# Altium PCB PCB1.PcbDoc
Units mil, origin at the board's own origin, x right, y up, seen from the top; angles counter-clockwise.
Board outline 3543.31 x 3543.31 mil, 2 copper layers (Top Layer, Bottom Layer); 61 components, 55 nets, 197 pads, 51 vias.
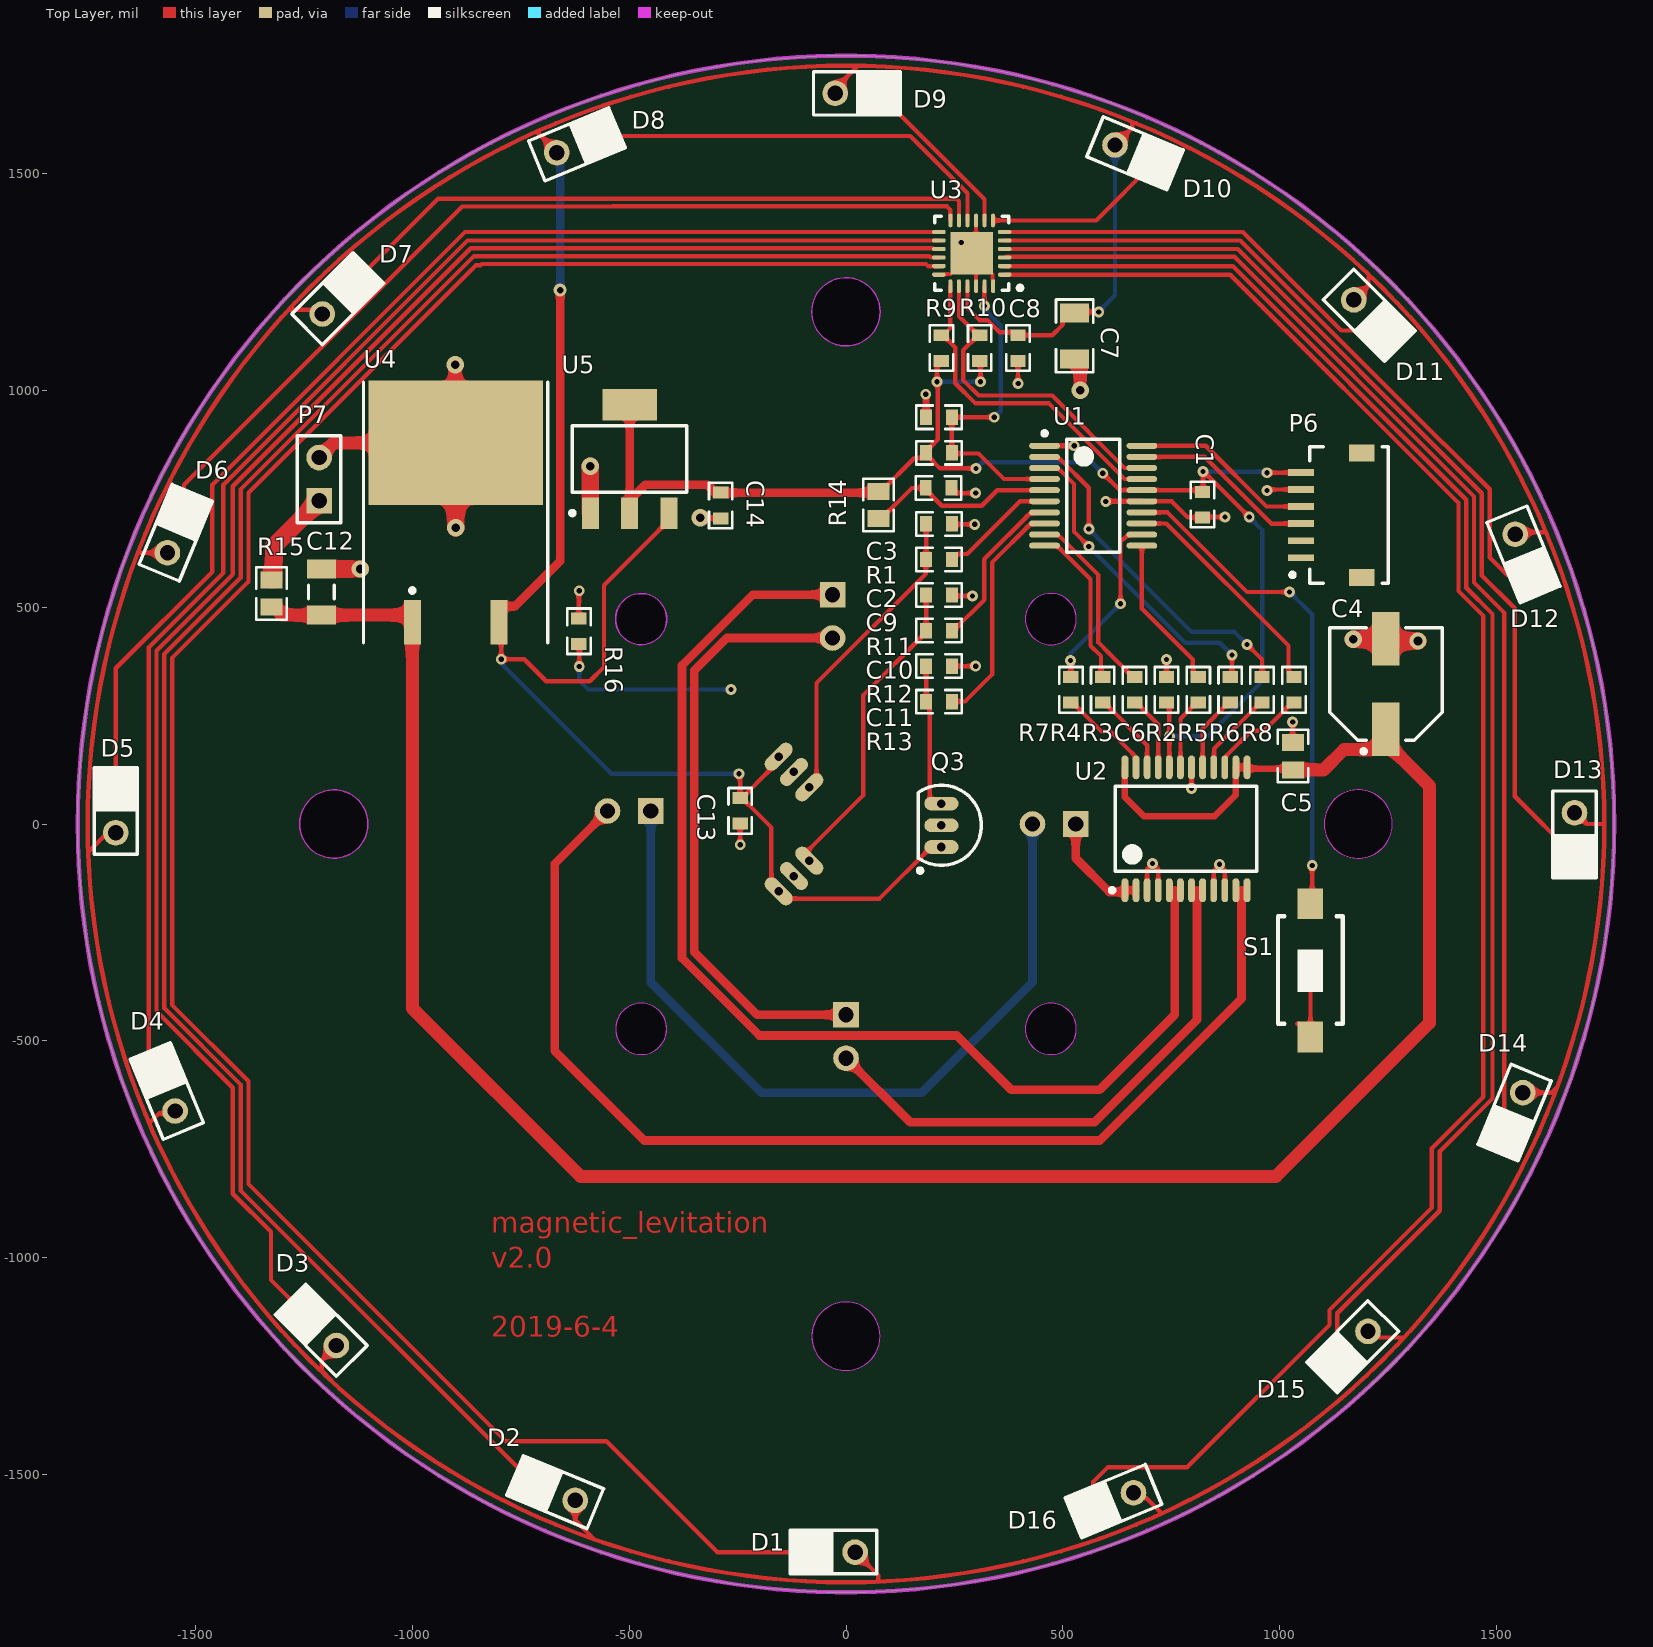
[diagram p0: Top Layer view]
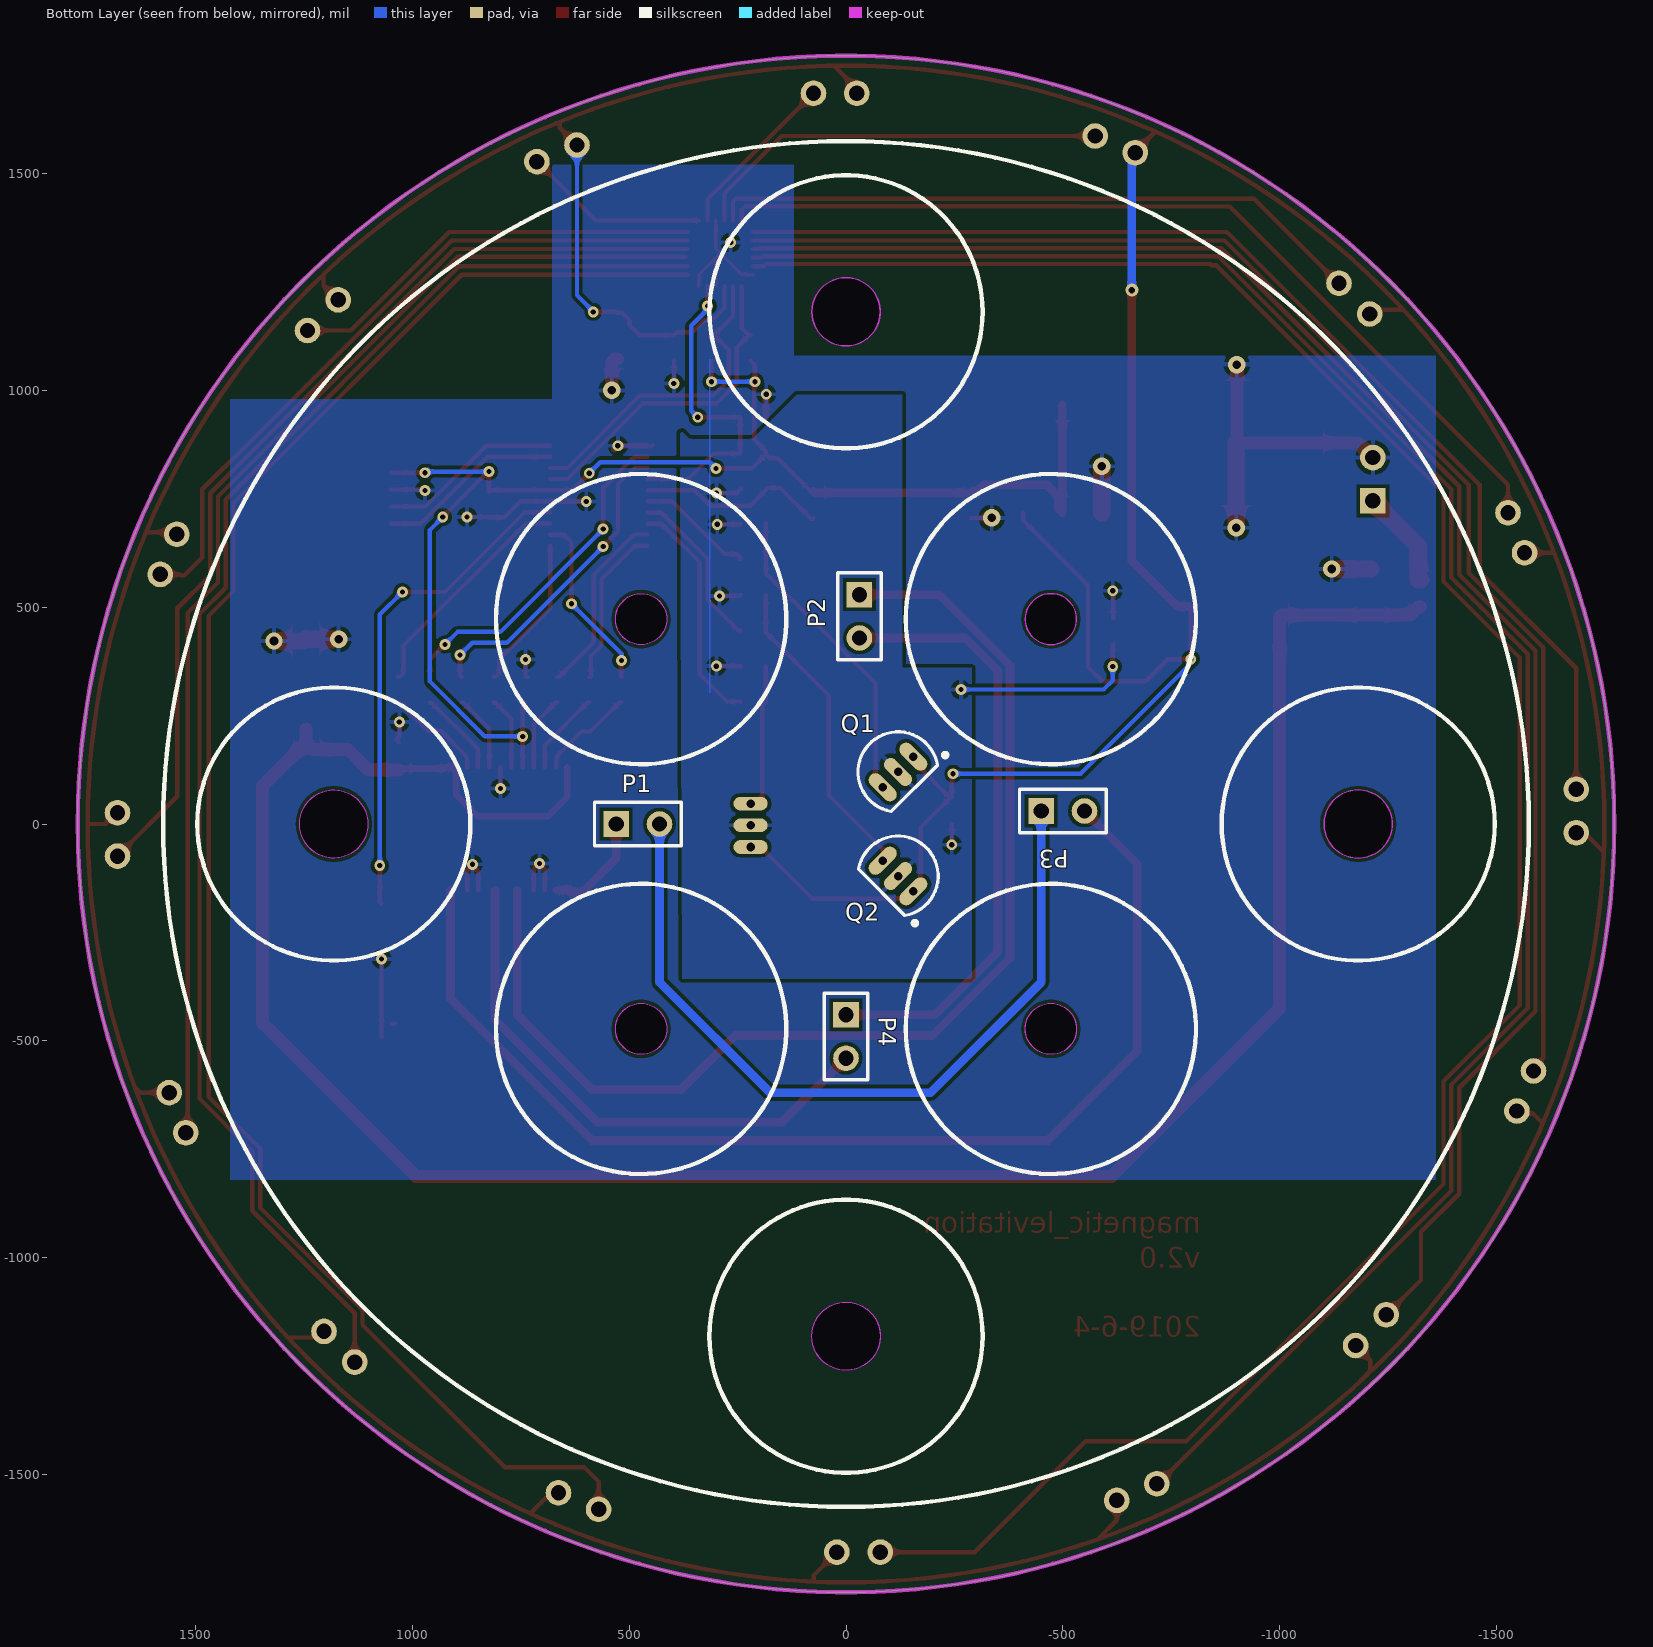
[diagram p1: Bottom Layer view, seen from below]

## Layer stack, top to bottom
Top Solder: solder mask 0.4, Solder Resist, Dk 3.5
Top Layer: signal copper 1.4
Dielectric 1: dielectric 12.6, FR-4, Dk 4.8
Bottom Layer: signal copper 1.4
Bottom Solder: solder mask 0.4, Solder Resist, Dk 3.5

## Board outline
-1771.65,0 ccw(c0,0) 0,-1771.65 ccw(c0,0) 1771.65,0 ccw(c0,0) 0,1771.65 ccw(c0,0)
cut-out: -472.44,413.39 cw(c-472.44,472.44) -531.5,472.44 cw(c-472.44,472.44) -472.44,531.5 cw(c-472.44,472.44) -413.39,472.44 cw(c-472.44,472.44)
cut-out: -78.74,-1181.1 ccw(c0,-1181.1) 0,-1259.84 ccw(c0,-1181.1) 78.74,-1181.1 ccw(c0,-1181.1) 0,-1102.36 ccw(c0,-1181.1)
cut-out: 1102.36,0 ccw(c1181.1,0) 1181.1,-78.74 ccw(c1181.1,0) 1259.84,0 ccw(c1181.1,0) 1181.1,78.74 ccw(c1181.1,0)
cut-out: -1181.1,-78.74 cw(c-1181.1,0) -1259.84,0 cw(c-1181.1,0) -1181.1,78.74 cw(c-1181.1,0) -1102.36,0 cw(c-1181.1,0)
cut-out: 0,1102.36 cw(c0,1181.1) -78.74,1181.1 cw(c0,1181.1) 0,1259.84 cw(c0,1181.1) 78.74,1181.1 cw(c0,1181.1)
cut-out: 413.39,-472.44 ccw(c472.44,-472.44) 472.44,-531.5 ccw(c472.44,-472.44) 531.5,-472.44 ccw(c472.44,-472.44) 472.44,-413.39 ccw(c472.44,-472.44)
cut-out: -531.5,-472.44 ccw(c-472.44,-472.44) -472.44,-531.5 ccw(c-472.44,-472.44) -413.39,-472.44 ccw(c-472.44,-472.44) -472.44,-413.39 ccw(c-472.44,-472.44)
cut-out: 413.39,472.44 ccw(c472.44,472.44) 472.44,413.39 ccw(c472.44,472.44) 531.5,472.44 ccw(c472.44,472.44) 472.44,531.5 ccw(c472.44,472.44)

## Design rules (kind name [scope] priority, off if disabled: settings)
Clearance Clearance_mini [All] p1 off: gap=8 ignorepadtopadclearanceinfootprint=TRUE
Clearance Clearance_normal [All] p2: gap=8 ignorepadtopadclearanceinfootprint=TRUE
MinimumSolderMaskSliver [All] p1 off: minsoldermaskwidth=6
PolygonConnect [All] p1: connectstyle=Relief reliefconductorwidth=10 reliefentries=4 polygonreliefangle="90 Angle" airgapwidth=10
RoutingVias RoutingVias_mini [All] p1 off: holewidth=10 width=20 viastyle="Through Hole" minholewidth=10 minwidth=20 maxholewidth=15 maxwidth=30
RoutingVias RoutingVias_normal [All] p2: holewidth=12 width=25 viastyle="Through Hole" minholewidth=8 minwidth=16 maxholewidth=100 maxwidth=120
SignalStimulus [All] p1: kind=1 level=0 starttime=10.00n stoptime=60.00n periodtime=100.0n
SilkToSilkClearance [All] p1 off: silktosilkclearance=10
SilkToSolderMaskClearance [IsPad] p1 off: minsilkscreentomaskgap=8 clearancetoexposedcopper=TRUE
SolderMaskExpansion [All] p1: expansion=4
Width Width_mini [All] p1 off: maxlimit=10 minlimit=6 preferedwidth=8
Width Width_normal [All] p2: maxlimit=100 minlimit=6 preferedwidth=10
27 further rules are at their usual default settings.

## Classes and differential pairs
component class Sheet2: C12 C14 P6 P7 R15 U4 U5
component class Sheet1: C1 C2 C3 C4 C5 C6 C7 C8 C9 C10 C11 C13 D1 D2 D3 D4 D5 D6 D7 D8 D9 D10 D11 D12 D13 D14 D15 D16 F P1 P2 P3 P4 Q1 Q2 Q3 R1 R2 R3 R4 R5 R6 R7 R8 R9 R10 R11 R12 R13 R14 R16 S1 U1 U2 U3

## Components (designator, comment, footprint, x,y, rotation, side; value= is the part's Value field where it differs from the comment)
C1 "CAP_0603" C0603 822,707 r90 top value=0.1uF
C2 "CAP_0603" C0603 243,775 r180 top value=10nF
C3 "CAP_0603" C0603 184.94,937.97 r0 top value=0.1uF
C4 "CAP_Aluminium" C6.3X5.4 1245,323 r90 top value=22uF
C5 "CAP_0805" C0805 1031,188 r270 top value=0.1uF
C6 "CAP_0603" C0603 739,339 r270 top value=0.1uF
C7 "CAP_1206" C1206#1 527.33,1072.43 r90 top value=4.7uF
C8 "CAP_0603" C0603 396.67,1068.06 r90 top value=0.1uF
C9 "CAP_0603" C0603 184.94,692 r0 top value=10nF
C10 "CAP_0603" C0603 184.94,528.02 r0 top value=10nF
C11 "CAP_0603" C0603 184.94,364.04 r0 top value=10nF
C12 "Cap Semi" C1206#2 -1210,535 r90 top value=100pF
C13 "CAP_0603" C0603 -244,0.94 r90 top value=0.1uF
C14 "CAP_0603" C0603 -289,704.94 r90 top value=0.1uF
D1 "LED" LED_DIP 21,-1679 r180 top
D2 "LED" LED_DIP -624.42,-1559.77 r157.5 top
D3 "LED" LED_DIP -1175.09,-1202.62 r135 top
D4 "LED" LED_DIP -1547.16,-661.92 r112.5 top
D5 "LED" LED_DIP -1684,-20 r90 top
D6 "LED" LED_DIP -1564.77,625.42 r67.5 top
D7 "LED" LED_DIP -1207.62,1176.09 r45 top
D8 "LED" LED_DIP -666.92,1548.16 r22.5 top
D9 "LED" LED_DIP -25,1685 r0 top
D10 "LED" LED_DIP 620.42,1565.77 r337.5 top
D11 "LED" LED_DIP 1171.09,1208.62 r315 top
D12 "LED" LED_DIP 1543.16,667.92 r292.5 top
D13 "LED" LED_DIP 1680,26 r270 top
D14 "LED" LED_DIP 1560.77,-619.42 r247.5 top
D15 "LED" LED_DIP 1203.62,-1170.09 r225 top
D16 "LED" LED_DIP 662.92,-1542.16 r202.5 top
P1 "Header 2" HDR1X2 530,0 r180 bottom
P2 "Header 2" HDR1X2 -31,529 r270 bottom
P3 "Header 2" HDR1X2 -450,30 r180 bottom
P4 "Header 2" HDR1X2 0,-440 r270 bottom
P6 "SH1.0" SH1.0_6_PIN 1049.24,613.87 r90 top
P7 "Header 2" HDR1X2 -1215,745 r90 top
Q1 "HALL" HALL_3503_TO-92 -120,120 r225 bottom
Q2 "HALL" HALL_3503_TO-92 -120,-120 r315 bottom
Q3 "HALL" HALL_3503_TO-92 220,-3 r180 top
R1 "RES_0603" R0603 243.94,855.98 r180 top value=10k
R2 "RES_0603" R0603 812.48,280 r90 top value=10k
R3 "RES_0603" R0603 665.52,280 r90 top value=10k
R4 "RES_0603" R0603 592.03,280 r90 top value=10k
R5 "RES_0603" R0603 885.97,280 r90 top value=10k
R6 "RES_0603" R0603 959.45,280 r90 top value=10k
R7 "RES_0603" R0603 518.55,280 r90 top value=10k
R8 "RES_0603" R0603 1032.94,280 r90 top value=10k
R9 "RES_0603" R0603 220,1127.06 r270 top value=10k
R10 "RES_0603" R0603 308.33,1127.06 r270 top value=10k
R11 "RES_0603" R0603 184.94,610.01 r0 top value=1k
R12 "RES_0603" R0603 184.94,446.03 r0 top value=1k
R13 "RES_0603" R0603 184.94,282.05 r0 top value=1k
R14 "RES_0805" R0805 75,704.01 r90 top value=1k@100Mhz
R15 "RES_0805" R0805 -1325,500 r90 top value=0
R16 "RES_0603" R0603 -616,414.94 r90 top value=0
S1 "BUTTON" BUTTON_6X6 1071,-183.91 r270 top
U1 "STM32F030F4P6" STM-TSSOP20_N 570,757 r0 top
U2 "TB6612FNG" TB6612FNG 784,-11 r90 top
U3 "AW9523B" AW9523B 290,1316 r180 top
U4 "MC7805CD2T" 936-03 -900,672.31 r0 top
U5 "REG1117-3.3" TI-DCY4_N -499,842 r90 top

## Footprints (in the part's own frame and the unit in brackets; to place one, negate y for a bottom-side part, rotate by r counter-clockwise, add the part's x,y. Pads: shape width x height; smd on the part's side, far side on the other; paste and mask are expansions set on the pad)
936-03 [mm] "D2-PAK/TO-263-AB; 3 Leads (1 Cropped); Body 14.7 (inc. leads) x 10.2 mm (LxW max)"
  rect 1x2.6 smd: 1(-2.54,-5.25) 3(2.54,-5.25)
  rect 10.2x7.3 smd: 4(0,5.25)
  silkscreen extent -5.4,-6.45 5.4,8.8
AW9523B [mm] "QFN, 24-Leads, Body 4.00x4.00mm, Pitch 0.50mm, Thermal Pad 2.70x2.70mm, IPC Medium Density"
  oval 0.8x0.25 smd: 1(-1.925,1.25) 2(-1.925,0.75) 3(-1.925,0.25) 4(-1.925,-0.25) 5(-1.925,-0.75) 6(-1.925,-1.25) 13(1.925,-1.25) 14(1.925,-0.75) 15(1.925,-0.25) 16(1.925,0.25) 17(1.925,0.75) 18(1.925,1.25)
  oval 0.25x0.8 smd: 7(-1.25,-1.925) 8(-0.75,-1.925) 9(-0.25,-1.925) 10(0.25,-1.925) 11(0.75,-1.925) 12(1.25,-1.925) 19(1.25,1.925) 20(0.75,1.925) 21(0.25,1.925) 22(-0.25,1.925) 23(-0.75,1.925) 24(-1.25,1.925)
  rect 2.5x2.5 smd: 25(0,0)
  silkscreen extent -2.95,-2.18 2.18,2.18, body extent -2.07,-2.07 2.07,2.07, height 0.8
BUTTON_6X6 [mm]
  rect 1.8x1.5 smd: 1(0,0) 2(7.8,0)
  silkscreen extent 0.73,-1.9 7.03,1.9, body extent -0.1,-1.83 7.9,1.87, height 2.5
C6.3X5.4 [mm] "贴片电解 6.3*5.4"
  rect 3.15x1.6 smd: 1(-2.65,0) 2(2.65,0)
  silkscreen extent -4.07,-3.3 3.3,3.3, body extent -3.5,-3.3 3.5,3.3, height 5.4
C0603 [mm] "Normal CAP or RES"
  rect 0.7x0.9 smd: 1(0,0) 2(1.5,0)
  silkscreen extent -0.58,-0.69 2.08,0.69, body extent -0.04,-0.39 1.56,0.41, height 0.6
C0805 [mm]
  rect 1x1.3 smd: 1(0,0) 2(1.6,0)
  silkscreen extent -0.74,-0.89 2.34,0.89, body extent -0.19,-0.62 1.81,0.63, height 1
C1206#1 [mm] "Capacitor"
  rect 1.1x1.7 smd: 1(-0.004,0) 2(2.696,0)
  silkscreen extent -0.79,-1.09 3.48,1.09, body extent -0.35,-0.9 3.05,0.9, height 1.3
C1206#2 [mm] "Chip Capacitor, Body 3.2x1.6mm, IPC High Density"
  rect 1.1x1.7 smd: 1(-1.35,0) 2(1.35,0)
  silkscreen extent -0.4,-0.75 0.4,0.75, body extent -1.7,-0.9 1.7,0.9, height 1.3
HALL_3503_TO-92 [mm] "TO, Flat Index; 3 In-Line, Axial Leads; Body Dia. 4.6mm; Leads 0.41 x 0.39 mm (max)"
  oval 2x0.8 hole 0.5: 1(0,1.27) 2(0,0) 3(0,-1.27)
  silkscreen extent -2.34,-2.34 1.37,2.77, body extent -2.54,-2.61 1.66,2.61, height 10
HDR1X2 [mm] "Connector; Header; 2 Position"
  rect 1.5x1.5 hole 0.9: 1(0,0)
  round 1.5 hole 0.9: 2(2.54,0)
  silkscreen extent -1.27,-1.27 3.81,1.27, body extent -1.27,-1.27 3.81,1.27, height 6.54
LED_DIP [mm]
  round 1.5 hole 0.9: 1(0,0) 2(2.54,0)
  silkscreen extent -1.27,-1.27 3.81,1.27
R0603 [mm]
  rect 0.7x0.9 smd: 1(0,0) 2(1.5,0)
  silkscreen extent -0.58,-0.69 2.08,0.69, body extent -0.01,-0.42 1.54,0.43, height 0.45
R0805 [mm] "Normal CAP or RES"
  rect 1x1.3 smd: 1(0,0) 2(1.6,0)
  silkscreen extent -0.74,-0.89 2.34,0.89, body extent -0.36,-0.66 1.94,0.69, height 0.76
SH1.0_6_PIN [mm] "connector"
  rect 1x1.5 smd: 0(-1.15,-3.55) 0(6.15,-3.55)
  rect 0.4x1.5 smd: 1(0,0) 2(1,0) 3(2,0) 4(3,0) 5(4,0) 6(5,0)
  silkscreen extent -1.5,-5.1 6.5,0.62
STM-TSSOP20_N [mm] "SOP, 20-Leads, Body 6.6x4.5mm, Pitch 0.65mm, IPC Medium Density"
  oval 1.8x0.35 smd: 1(-2.85,2.925) 2(-2.85,2.275) 3(-2.85,1.625) 4(-2.85,0.975) 5(-2.85,0.325) 6(-2.85,-0.325) 7(-2.85,-0.975) 8(-2.85,-1.625) 9(-2.85,-2.275) 10(-2.85,-2.925) 11(2.85,-2.925) 12(2.85,-2.275) 13(2.85,-1.625) 14(2.85,-0.975) 15(2.85,-0.325) 16(2.85,0.325) 17(2.85,0.975) 18(2.85,1.625) 19(2.85,2.275) 20(2.85,2.925)
  silkscreen extent -2.97,-3.3 1.55,3.77, body extent -2.25,-3.3 2.25,3.3, height 1.2
TB6612FNG [mm] "TSOP, 24-Leads, Body 8.15x5.60mm, Pitch 0.65mm, IPC Medium Density"
  oval 1.4x0.4 smd: 1(-3.6,3.575) 2(-3.6,2.925) 3(-3.6,2.275) 4(-3.6,1.625) 5(-3.6,0.975) 6(-3.6,0.325) 7(-3.6,-0.325) 8(-3.6,-0.975) 9(-3.6,-1.625) 10(-3.6,-2.275) 11(-3.6,-2.925) 12(-3.6,-3.575) 13(3.6,-3.575) 14(3.6,-2.925) 15(3.6,-2.275) 16(3.6,-1.625) 17(3.6,-0.975) 18(3.6,-0.325) 19(3.6,0.325) 20(3.6,0.975) 21(3.6,1.625) 22(3.6,2.275) 23(3.6,2.925) 24(3.6,3.575)
  silkscreen extent -3.72,-4.15 2.5,4.45, body extent -2.9,-4.15 2.9,4.15, height 1.6
TI-DCY4_N [mm] "SOT223, 4-Leads, Body 6.5x3.5mm, Pitch 2.3mm, IPC Medium Density"
  rect 1.85x1 smd: 1(-3.175,2.3) 2(-3.175,0) 3(-3.175,-2.3)
  rect 1.85x3.2 smd: 4(3.175,0)
  silkscreen extent -3.3,-3.35 1.95,3.47, body extent -1.85,-3.35 1.85,3.35, height 1.8

## Part data
C1 C2 C3 C6 C8 C9 C10 C11 C13 C14: "Capacitor 0603", Voltage=6.3V
C4: "aluminium electrolysis", Voltage=50V, Accuracy=10%
C5: "Capacitor 0805", Voltage=25V
C7: "Capacitor 1206", Voltage=25V
C12: "Capacitor (Semiconductor SIM Model)", LatestRevisionDate=29-May-2009, LatestRevisionNote="IPC-7351 Footprint Added.", PackageDescription="Chip Capacitor", PackageReference=C1206, Published=8-Jun-2000, Publisher="Altium Limited"
D1 D2 D3 D4 D5 D6 D7 D8 D9 D10 D11 D12 D13 D14 D15 D16: library part LED_DIP, "LED_DIP"
P1 P2 P3 P4 P7: "Header, 2-Pin", LatestRevisionDate=17-Jul-2002, LatestRevisionNote="Re-released for DXP Platform.", Publisher="Altium Limited"
P6: library part SH1.0_6_PIN, "1.0mm connector"
Q1 Q2 Q3: library part SS49E_3503, "HALL SS49E 3503"
R1 R2 R3 R4 R5 R6 R7 R8 R9 R10 R11 R12 R13 R14 R15 R16: "Resister", Precision=1%
S1: library part BUTTON_6x6, "BUTTON_1_6mm X 6mm SMT"
U1: "ARM Cortex-M0 32-bit MCU, 16 KB Flash, 4 KB Internal RAM, 15 I/Os, 20-pin TSSOP, -40 to 85 degC, Tube", I/Os (High Current)=15, Operating Frequency(F) (Processor speed) (MHz)=48, Supplier Part Number 1=497-14044-5-ND, Supply Voltage(Vcc) min (V)=2.4, ComponentLink1Description="Manufacturer URL", ComponentLink1URL=http://www.st.com/web/en/home.html, ComponentLink2Description=Datasheet, ComponentLink2URL=http://www.st.com/st-web-ui/static/active/en/resource/technical/document/datasheet/DM00088500.pdf, ComponentLink3Description="Package Specification", ComponentLink3URL=http://www.st.com/st-web-ui/static/active/en/resource/technical/document/datasheet/DM00065136.pdf, Core="ARM Cortex-M0", DatasheetVersion="Rev. 1", FLASH Size (Prog) (kB)=16, Internal RAM Size (kB)=4, Mounting Technology="Surface Mount", PackageDescription="20-Pin Thin Shrink Small Outline Package, 6.5 x 4.4 mm Body, 0.65 mm Pitch", PackageReference=TSSOP20, PackageVersion="Rev. 1, 11/2012", Packing=Tube, PartNumber=STM32F030F4P6, Supplier 1=Digi-Key, Supplier 2=Newark, Supplier 3=Mouser, Supplier Part Number 2=06X3648, Supplier Part Number 3=511-STM32F030F4P6
U2: "MOS driver", LatestRevisionDate=17-Jul-2002, LatestRevisionNote="Re-released for DXP Platform.", Publisher="Altium Limited"
U3: "led driver"
U4: "Three-Terminal Positive Voltage Regulator", ComponentLink1Description="Manufacturer Link", ComponentLink1URL=http://www.onsemi.com/site/products/taxonomy/0,4438,503,00.html, ComponentLink2Description=Datasheet, ComponentLink2URL=http://www.onsemi.com/pub/Collateral/MC7800-D.PDF, DatasheetVersion=1997, Note="Pin 2 is electrically connected to Pin 4; Pin 2 is trimmed and not drawn;", PackageDescription="D2-PAK/TO-263-AB; 3 Leads (1 Cropped); Body 14.7 (inc. leads) x 10.2 mm (LxW max)", PackageReference=936-03, PackageVersion=1997, Published=15-Apr-2002, Publisher="Altium Limited"
U5: "Single Output LDO, 800 mA, Fixed 3.3 V Output, 3.8 to 15 V Input, with Internal Current Limiting, 4-pin SOT-223 (DCY), -40 to 125 degC, Green (RoHS & no Sb/Br)", Manufacturer="Texas Instruments", Rating=Catalog, Supplier Part Number 1=REG1117-3.3-ND, Code_JEDEC=TO-261, ComponentLink1Description="Manufacturer URL", ComponentLink1URL=http://www.ti.com/, ComponentLink2Description=Datasheet, ComponentLink2URL=http://www.ti.com/general/docs/lit/getliterature.tsp?genericPartNumber=REG1117-33&fileType=pdf, ComponentLink3Description="Package Specification", ComponentLink3URL=http://www.ti.com/litv/pdf/mpds094a, DatasheetVersion=SBVS001D, Eco-Plan="Green (RoHS & no Sb/Br)", Fixed Output Options(V)=5, Iout(Max)(A)=0.8, Iq(Typ)(mA)=4, Mounting Technology="Surface Mount", PackageDescription="4-Pin Plastic Small Outline, Body 3.5 x 6.5 mm, Pitch 2.3 mm", PackageReference=DCY4, PackageVersion=4202506/B, PartNumber=REG1117-3.3, SubFamily="Single Channel LDO", Supplier 1=Digi-Key, Supplier 2=Farnell, Supplier 3=Farnell, Supplier 4=Newark, Supplier 5=Mouser, Supplier Part Number 2=1212355, Supplier Part Number 3=2126471, Supplier Part Number 4=35C1963, Supplier Part Number 5=595-REG1117-3.3, Vdo(Typ)(mV)=1100, Vin(Max)(V)=15, Vin(Min)(V)=3.8, Vout Adj(Max)(V)=3.3, Vout Adj(Min)(V)=3.3

## Via types
v1: diameter 25, hole 12, Top Layer to Bottom Layer, 42 vias
v2: diameter 40, hole 20, Top Layer to Bottom Layer, 8 vias
v3: diameter 30, hole 15, Top Layer to Bottom Layer, 1 vias

## Nets (pads, with @x,y where several pads share a name; then routed paths per layer and width w, separated by ;. In a path a pad name is that pad's centre, name@x,y a point inside that pad or via, vN(x,y) a via of type N, cw(c..) or ccw(c..) an arc to the next point about the centre after c; other vN are vias at no path point)
3.3V: C1.2 C6.2 C14.2 P6.6 R1.2 R9.2 R10.2 R14.2 U1.16 U2.20 U5.2 U5.4 | length 3324.4
  Top Layer w10: R14.2 80.91,767 157.17,843.27 176.11,843.27 R1.2@184.89,852.05 ; R9.2 210,1058 v1(210,1020) 211.72,1018.28 211.72,886.75 184.89,859.92 R1.2 R1.2@184.89,852.05 ; v1(300,820) 216.94,820 R1.2@184.89,852.05 ; R10.2 310,1066.33 v1(310,1020) ; v1(592,809) 631.1,769.9 682.1,769.9 U1.16 818.26,769.8 C1.2 823.48,767.54 v1(823.48,812.58) 824.92,812.58 v1(929.75,707.75) ; C6.2 745.61,273.33 v1(745.61,202.03) U2.20 ; v1(970.72,810) 971.08,810.36 1048.87,810.36 P6.6
  Top Layer w20: U5.4 U5.2 -489.31,726.69 -489.31,755.69 -463,782 -318.43,782 -304.21,767.78 -292.78,767.78 C14.2 72,764 R14.2
  Bottom Layer w10: v1(210,1020) v1(310,1020) ; v1(300,820) 314.4,834.4 566.6,834.4 v1(592,809) ; v1(745.61,202.03) 833.03,202.03 959.5,328.5 959.5,678 v1(929.75,707.75) ; v1(823.48,812.58) 959.3,812.58 963.72,817 v1(970.72,810)
5V: C7.2 C8.2 C13.2 D1.1 D2.1 D3.1 D4.1 D5.1 D6.1 D7.1 D8.1 D9.1 D10.1 D11.1 D12.1 D13.1 D14.1 D15.1 D16.1 Q1.1 Q2.1 Q3.1 U3.21 U4.3 U5.3 | length 16568.2
  Top Layer w10: -1747,-64 -1712.39,-29.39 -1693.39,-29.39 D5.1 ; -1633.53,624.16 -1632.27,625.42 D6.1 ; -1603.81,-687.37 -1584.25,-667.81 -1553.05,-667.81 D4.1 ; -1283,1186 -1238,1186 -1237.48,1185.48 -1217,1185.48 D7.1 ; -1187,-1283 -1209,-1261 -1209,-1236.53 D3.1 ; U4.3 -795,460.62 v1(-795,380) -742,380 -691,329 -591,329 -558,362 -558,550.72 -408.45,700.27 U5.3 ; -713.03,1596.43 -666.92,1550.32 D8.1 ; D2.1 -624.42,-1605.58 -581,-1649 ; v1(-247,116) -244.13,113.13 -244.13,88.91 -244,88.78 C13.2 C13.2@-240.06,60 ; Q1.1 -176.17,134.54 -176.17,123.89 C13.2@-240.06,60 ; D9.1 -25,1696 27,1748 ; D1.1 74,-1732 74,-1747 ; Q3.1 196.38,-53 77.32,-172.06 -138.65,-172.06 Q2.1 -172.06,-138.65 -172.06,-8 C13.2@-240.06,60 ; U3.21 280.16,1189.78 308.01,1161.93 326.07,1161.93 353.84,1134.16 389.61,1134.16 C8.2 475.86,1127.11 499.16,1150.42 499.16,1161.93 515.82,1178.58 C7.2 529.75,1181 v1(583,1181) ; D10.1 660,1605.34 660,1617 ; D16.1 676.2,-1542.16 689.06,-1555.03 693.03,-1555.03 728,-1590 ; D11.1 1205,1242.53 1205,1267 ; D15.1 1216.89,-1170.09 1230.8,-1184 1287,-1184 ; D12.1 1548.24,673 1613,673 ; D14.1 1627.58,-619.42 1639,-608 ; D13.1 1682.69,26 1708.69,0 1748.79,0 ; 1748.79,0 ccw(c0,0) 1748.79,0
  Top Layer w20: U4.3 -800,492.58 -790.31,502.26 -763.35,502.26 -659,606.62 v3(-659,1231)
  Bottom Layer w10: v1(-795,380) -795,370 -541,116 v1(-247,116) ; v1(583,1181) 583,1182 620.42,1219.42 D10.1
  Bottom Layer w20: D8.1 -659.45,1540.69 -659.45,1517.37 -659,1516.92 v3(-659,1231)
12V: C4.1 C5.2 C12.1 R15.1 U2.13 U2.14 U2.24 U4.1 | length 5410.8
  Top Layer w15: U2.24 643.25,61.75 687,18 850,18 899.16,67.16 U2.14 U2.13 924.75,128.22 925.09,127.87 1028.14,127.87 C5.2
  Top Layer w30: R15.1 -1319.09,500 -1300.94,481.85 C12.1 -1004.69,481.85 -1000,477.16 U4.1 -1000,-425 -612,-813 991,-813 1345,-459 1345,88.16 C4.1@1245,188.16 ; C5.2 1101.59,125.01 1148.24,171.66 1228.5,171.66 C4.1@1245,188.16 ; C4.1 C4.1@1245,188.16
12Vin: P7.1 R15.2 | length 230.7
  Top Layer w40: R15.2 -1319.72,562.99 -1319.41,563.31 -1319.41,640.59 P7.1
AGND: C2.1 C9.2 C10.2 C11.2 C13.1 Q1.2 Q2.2 Q3.2 R16.1 | length 712.1
  Top Layer w10: R16.1 -615,413.94 v1(-615,363) ; v1(-244,-48) C13.1 ; C2.1 243,771.78 251.78,763 v1(299,763) ; C11.2 v1(299,364) v1(299,364) ; C10.2 246.02,526 v1(292,526) ; C9.2 245,691 v1(297,691)
  Bottom Layer w10: v1(-615,363) -615,331 -594,310 v1(-265,310)
button: S1.1 U1.14 | length 1159
  Top Layer w10: U1.14 741.39,718.61 925,535 v1(1023,535) ; S1.1 1075,-179.91 v1(1075,-96)
  Bottom Layer w10: v1(1023,535) 1075,483 v1(1075,-96)
coil_1: P1.1 U2.1 U2.2 | length 256.7
  Top Layer w15: U2.1 U2.2
  Top Layer w20: P1.1 530,-79 607.67,-156.67 635.71,-156.67 643.25,-149.13 U2.1
coil_2: P2.1 U2.5 U2.6 | length 2710.3
  Top Layer w20: P2.1 -214.6,529 -378,365.6 -378,-309 -199.47,-487.53 255.53,-487.53 381,-613 585,-613 758.41,-439.59 758.41,-152.73
coil_3: P3.2 U2.11 U2.12 | length 2659
  Top Layer w20: P3.2 -672,-92 -672,-523 -465,-730 585,-730 912,-403 912,-207 911.95,-206.95 911.95,-152.73
coil_4: P4.2 U2.7 U2.8 | length 1267.6
  Top Layer w20: P4.2 148,-688 573,-688 809.59,-451.41 809.59,-152.73
drv_en: R2.2 U1.11 | length 359.1
  Top Layer w10: U1.11 682.2,496.86 799.77,379.3 799.77,347.84 808.55,339.06 R2.2
drv_in_a1: R3.2 U1.9 | length 434.9
  Top Layer w10: U1.9 487.36,667.43 493.06,661.73 494.58,661.73 582,574.31 582,418.64 606.09,394.54 661.58,339.06 R3.2
drv_in_a2: R4.2 U1.10 | length 377.4
  Top Layer w10: U1.10 486.34,641.84 564,564.18 564,411.18 588.09,387.08 588.09,339.06 R4.2
drv_in_b1: R6.2 U1.2 | length 791.5
  Top Layer w10: U1.2 487.36,846.57 493.06,840.87 494.58,840.87 560,775.44 v1(560,680) ; v1(925,414) 959.45,379.55 R6.2
  Bottom Layer w10: v1(560,680) 797,443 896,443 v1(925,414)
drv_in_b2: R5.2 U1.3 | length 727.7
  Top Layer w10: U1.3 487.36,820.98 493.06,815.28 494.58,815.28 525.82,784.03 525.82,674.18 v1(560,640) ; R5.2 890,343.09 v1(890,390)
  Bottom Layer w10: v1(560,640) 782,418 862,418 v1(890,390)
drv_pwm_a: R7.2 U1.12 | length 416.1
  Top Layer w10: v1(518,377) 518.55,376.45 R7.2 ; v1(633,508) 633,650 649.71,666.71 681.48,666.71 U1.12
  Bottom Layer w10: v1(518,377) 517,378 517,392 v1(633,508)
drv_pwm_b: R8.2 U1.13 | length 534.5
  Top Layer w10: U1.13 738.49,693.02 1020.22,411.3 1020.22,347.84 1029,339.06 R8.2
GND: C1.1 C3.1 C4.2 C5.1 C6.1 C7.1 C8.1 C12.2 C14.1 P6.5 P7.2 R16.2 S1.2 U1.1 U1.15 U2.3 U2.4 U2.9 U2.10 U2.18 U3.9 U3.18 U3.22 U3.24 U3.25 U4.4 U5.1 | length 2744.8
  Top Layer w8: U3.18 225.54,1266.79 226.71,1267.96 240.1,1267.96 241.96,1267.96 U3.25 ; U3.22 U3.25@299.84,1306.16 ; U3.9 299.84,1325.84 U3.25 ; U3.24 339.21,1251.54 338.04,1252.71 338.04,1266.1 338.04,1267.96 U3.25@299.84,1306.16 ; U3.25 U3.25@299.84,1306.16
  Top Layer w10: R16.2 v1@-616,539 ; v2(-336,706) -335.47,705.47 -289.53,705.47 C14.1 ; C8.1 396.67,1016.33 v1(397,1016) ; U1.1@446,873.9 U1.1@448.47,871.43 ; U1.15 750.8,744.2 788,707 C1.1 823,708 v1(874,708) ; U2.3 694.43,-104.36 707,-91.79 v1@707,-91.33 ; v1(707,-91) v1@707,-91.33 ; U2.4 720.02,-104.36 v1@707,-91.33 ; C6.1@735.06,339 C6.1 v1(739,379.64) ; U2.18 797,130.53 v1(797,82) ; U2.9 847.98,-110.02 861,-97 861,-93.79 873.57,-106.36 U2.10 ; v1(971,769) 973.35,771.35 P6.5 ; v1(1030,235) 1030,201 1037,194 C5.1 ; 1040.57,-460.57 S1.2@1046.47,-460.57 ; S1.2 v1(1071,-311)
  Top Layer w12: U1.1 v1(526.14,872.16) ; v1@599.2,744.2 U1.15
  Top Layer w15: v1(184,991) 184.94,990.06 C3.1 ; v1(526.14,872.16) v1@534.29,864 ; v1(599,744) v1@599.2,744.2
  Top Layer w20: v1@-616,539 v1(-615,538)
  Top Layer w30: P7.2 -1181,879 U4.4 -901.25,880.25 v2(-901.25,1059.25) ; C7.1 533.35,1072.28 540,1065.63 v2(540,1000)
  Top Layer w40: C12.2 -1120.15,588.15 v2(-1120,588) ; v2(-900,683) U4.4 ; v2(-590,825) -589.55,824.55 U5.1 ; v2(1170,426) 1243.67,426 C4.2 1250.33,422 v2(1319,422)
  Bottom Layer w10: v1@969,767 v1(971,769)
  other v1: 861,-93 266,1341
hall_a: C9.1 Q1.3 R11.1 | length 719
  Top Layer w10: Q1.3 -67.94,101.35 -67.94,325.01 184.34,577.29 184.34,609.4 R11.1 C9.1
hall_adc_a: R11.2 U1.6 | length 271.7
  Top Layer w10: R11.2 244,613.95 252.78,622.73 279.77,622.73 401.24,744.2 U1.6
hall_adc_b: R12.2 U1.7 | length 381.7
  Top Layer w10: R12.2 248.09,446.03 318.9,516.83 318.9,610.8 425.99,717.89 457.07,717.89 U1.7
hall_adc_detect: R13.2 U1.8 | length 535.3
  Top Layer w10: R13.2 244.61,282.65 274.65,282.65 336.9,344.9 336.9,603.21 425.99,692.3 457.07,692.3 U1.8
hall_b: C10.1 Q2.3 R12.1 | length 729.4
  Top Layer w10: Q2.3 -90.79,-78.5 -90.79,-64.45 39.47,65.8 39.47,296.61 184.94,442.09 R12.1 C10.1
hall_detect: C11.1 Q3.3 R13.1 | length 341.5
  Top Layer w10: C11.1 R13.1 193.16,273.83 193.16,56.93 203.09,47 Q3.3
i2c_clk: R9.1 U1.17 U3.19 | length 768.1
  Top Layer w10: R9.1 R9.1@223.94,1127.06 ; U3.19 240.79,1143.91 R9.1@223.94,1127.06 ; U1.17 682.09,795.5 642.5,795.5 468,970 298.48,970 252,1016.48 252,1098.99 R9.1@223.94,1127.06
i2c_sda: R10.1 U1.18 U3.20 | length 748.9
  Top Layer w10: U3.20 260.47,1170.98 R10.1@304.4,1127.06 ; R10.1 R10.1@304.4,1127.06 ; U1.18 642.48,820.98 475.46,988 305.94,988 270,1023.94 270,1092.66 R10.1@304.4,1127.06
NetD1_2: D1.2 U3.17 | length 5203.2
  Top Layer w10: D1.2 -297,-1679 -553,-1423 -785,-1423 -1378,-830 -1378,-593.09 -1554,-417.09 -1554,383 -1378,559 -1378,763.87 -853.71,1288.16 -843,1288.16 -839.66,1291.5 184.56,1291.5 189.51,1286.55 214.13,1286.55 U3.17
NetD2_2: D2.2 U3.16 | length 4556
  Top Layer w10: D2.2 -719.5,-1521.5 -1396,-845 -1396,-600.54 -1572,-424.54 -1572,392.09 -1396,568.09 -1396,771.33 -857.83,1309.5 192.02,1309.5 195.28,1306.24 214.13,1306.24 U3.16
NetD3_2: D3.2 U3.15 | length 3982.3
  Top Layer w10: D3.2 -1326,-1051.71 -1326,-940.46 -1414,-852.46 -1414,-608 -1590,-432 -1590,399.54 -1414,575.54 -1414,778.78 -865.28,1327.5 199.47,1327.5 201.05,1325.92 214.13,1325.92 U3.15
NetD4_2: D4.2 U3.14 | length 3315.9
  Top Layer w10: D4.2 -1585.43,-561.72 -1608,-539.15 -1608,407 -1435.71,579.29 -1435.71,782.53 -872.71,1345.53 U3.14
NetD5_2: D5.2 U3.13 | length 2711.6
  Top Layer w10: D5.2 -1684,359 -1461.17,581.83 -1461.17,782.53 -878.48,1365.21 U3.13
NetD6_2: D6.2 U3.12 | length 2125.5
  Top Layer w10: D6.2 -1526.5,782.5 -885,1424 -538,1424 -537.84,1424.16 232.84,1424.16 240.79,1416.21 U3.12
NetD7_2: D7.2 U3.11 | length 1525.2
  Top Layer w10: D7.2 -1135.58,1246.8 -940.23,1442.16 254.61,1442.16 260.47,1436.3 U3.11
NetD8_2: D8.2 U3.10 | length 972
  Top Layer w10: D8.2 148.11,1586.43 280.16,1454.39 U3.10
NetD9_2: D9.2 U3.8 | length 394.5
  Top Layer w10: D9.2 319.53,1440.47 U3.8
NetD10_2: D10.2 U3.7 | length 429.8
  Top Layer w10: U3.7 577.1,1391.79 D10.2
NetD11_2: D11.2 U3.6 | length 970.2
  Top Layer w10: U3.6 914.79,1365.21 1142,1138 1241.71,1138 D11.2
NetD12_2: D12.2 U3.5 | length 1628.5
  Top Layer w10: U3.5 909.02,1345.53 1377.54,877 1379,877 1484.27,771.73 1484.27,614.73 1525.86,573.14 1534.14,573.14 1536.53,575.53 D12.2
NetD13_2: D13.2 U3.4 | length 2259
  Top Layer w10: U3.4 903.25,1325.84 1466.27,762.82 1466.27,573.19 1542,497.46 1542,64 D13.2
NetD14_2: D14.2 U3.3 | length 2805.3
  Top Layer w10: U3.3@369.72,1307.84 895.79,1307.84 1448.27,755.36 1448.27,556.73 1518.24,486.76 1518.24,-707.55 D14.2
NetD15_2: D15.2 U3.2 | length 3449.8
  Top Layer w10: U3.2 891.7,1286.47 1430.27,747.9 1430.27,544.73 1491,484 1491,-633 1369,-755 1369,-892 1132.91,-1128.09 D15.2
NetD16_2: D16.2 U3.1 | length 4088.9
  Top Layer w10: U3.1 885.93,1266.79 1412.27,740.45 1412.27,537.27 1469.77,479.77 1469.77,-628.77 1351,-747.54 1351,-884.54 1114.91,-1120.64 1114.91,-1155.09 787,-1483 604,-1483 570.53,-1516.47 D16.2
NetP1_2: P1.2 P3.1 | length 1851.2
  Bottom Layer w20: P3.1 -450,-365 -195,-620 175,-620 430,-365 P1.2
NetP2_2: P2.2 P4.1 | length 1409.1
  Top Layer w20: P2.2 -275,429 -350,354 -350,-295 -205,-440 P4.1
NetR2_1: R2.1 U2.19 | length 168.7
  Top Layer w10: U2.19 771.2,242.66 808.55,280 R2.1
NetR3_1: R3.1 U2.21 | length 174.2
  Top Layer w10: R3.1 669.45,280 720.02,229.43 U2.21
NetR4_1: R4.1 U2.22 | length 194
  Top Layer w10: R4.1 595.97,280 694.43,181.53 U2.22
NetR5_1: R5.1 U2.17 | length 177.9
  Top Layer w10: U2.17 822.5,130.85 822.5,220.47 882.03,280 R5.1
NetR6_1: R6.1 U2.16 | length 197.7
  Top Layer w10: U2.16 848.81,131.56 848.81,173.29 955.52,280 R6.1
NetR7_1: R7.1 U2.23 | length 226
  Top Layer w10: R7.1 522.48,280 589.15,213.33 609.86,213.33 667.74,155.45 667.74,131.83 U2.23
NetR8_1: R8.1 U2.15 | length 235
  Top Layer w10: U2.15 873.57,151.97 878.28,156.69 878.28,159.06 934.36,215.14 964.14,215.14 1029,280 R8.1
NRST: C3.2 R1.1 U1.4 U3.23 | length 751.8
  Top Layer w10: v1(319,1194.53) 319,1239.68 U3.23 ; v1@346.94,933 v1(341.97,937.97) C3.2 243.94,937.92 R1.1 243.94,854.28 305.52,854.28 364.42,795.39 U1.4
  Bottom Layer w10: v1(319,1194.53) 319,1188.07 319.53,1187.54 318.99,1187.01 357,1149 357,953 v1(341.97,937.97)
sw_clk: P6.4 U1.20 | length 425.1
  Top Layer w10: U1.20 829.36,872.16 969.54,731.98 P6.4
sw_dio: P6.3 U1.19 | length 430.8
  Top Layer w10: U1.19 827.43,846.57 981.39,692.61 P6.3
vdda: C2.2 R14.1 U1.5 | length 446.3
  Top Layer w10: R14.1 80.91,704.01 151.9,775 C2.2 183.94,771.06 221.01,734 313,734 348.8,769.8 U1.5
pads on no net: P6.0 P6.1 P6.2

## Polygon pours and split planes (outlines as drawn)
GND on Bottom Layer "GND_L02_P036" (solid, remove dead copper, pour order 36): 1420,-820 -1360,-820 -1360,1080 120,1080 120,1520 677,1520 677,980 1420,980
AGND on Bottom Layer "AGND_L02_P024" (solid, remove dead copper, pour order 24): 377.19,-357 -290,-357 -290,360 -130,360 -130,990 382.54,990
no net on Bottom Layer "NONET_L02_P034" (solid, remove dead copper, pour order 34): 1413,899
no net on Bottom Layer "NONET_L02_P022" (solid, remove dead copper, pour order 22): 348,-284
no net on Bottom Layer "NONET_L02_P020" (solid, remove dead copper, pour order 20): 314,304 314,899 314,1072
no net on Bottom Layer "AGND" (solid, pour order 12): -290,291

## Keep-outs
Keep-Out Layer:
  circle w0.98: c0,1181.1 r78.74
  circle w1: c-1181.1,0 r78.74
  circle w1: c0,-1181.1 r78.74
  circle w1: c1181.1,0 r78.74
  circle w1: c-472.44,-472.44 r59.06
  circle w1: c472.44,-472.44 r59.06
  circle w1: c-472.44,472.44 r59.06
  circle w1: c472.44,472.44 r59.06
  circle w10: c0,0 r1771.65

## Other copper
Top Layer:
  text "magnetic_levitation / v2.0 /  / 2019-6-4" at -818,-1199 h80

## Silkscreen, mask and mechanical layers (free items; w line width, h text height)
Bottom Overlay:
  circle w10: c0,-1181.1 r314.96
  circle w10: c-1181.1,0 r314.96
  circle w10: c0,1181.1 r314.96
  circle w10: c1181.1,0 r314.96
  circle w10: c-472.44,-472.44 r334.65
  circle w10: c472.44,-472.44 r334.65
  circle w10: c472.44,472.44 r334.65
  circle w10: c-472.44,472.44 r334.65
  circle w10: c0,0 r1574.8